# Altium PCB PCB_SensorTapeFlex_v1.PcbDoc (part 4 of 4)
Units mm, origin at the board's own origin, x right, y up, seen from the top; angles counter-clockwise.
Board outline 228.71 x 24.8 mm, 2 copper layers (Top Layer, Bottom Layer); 234 components, 38 nets, 1134 pads, 768 vias.
Unrouted connection lines stored in the file: 1.
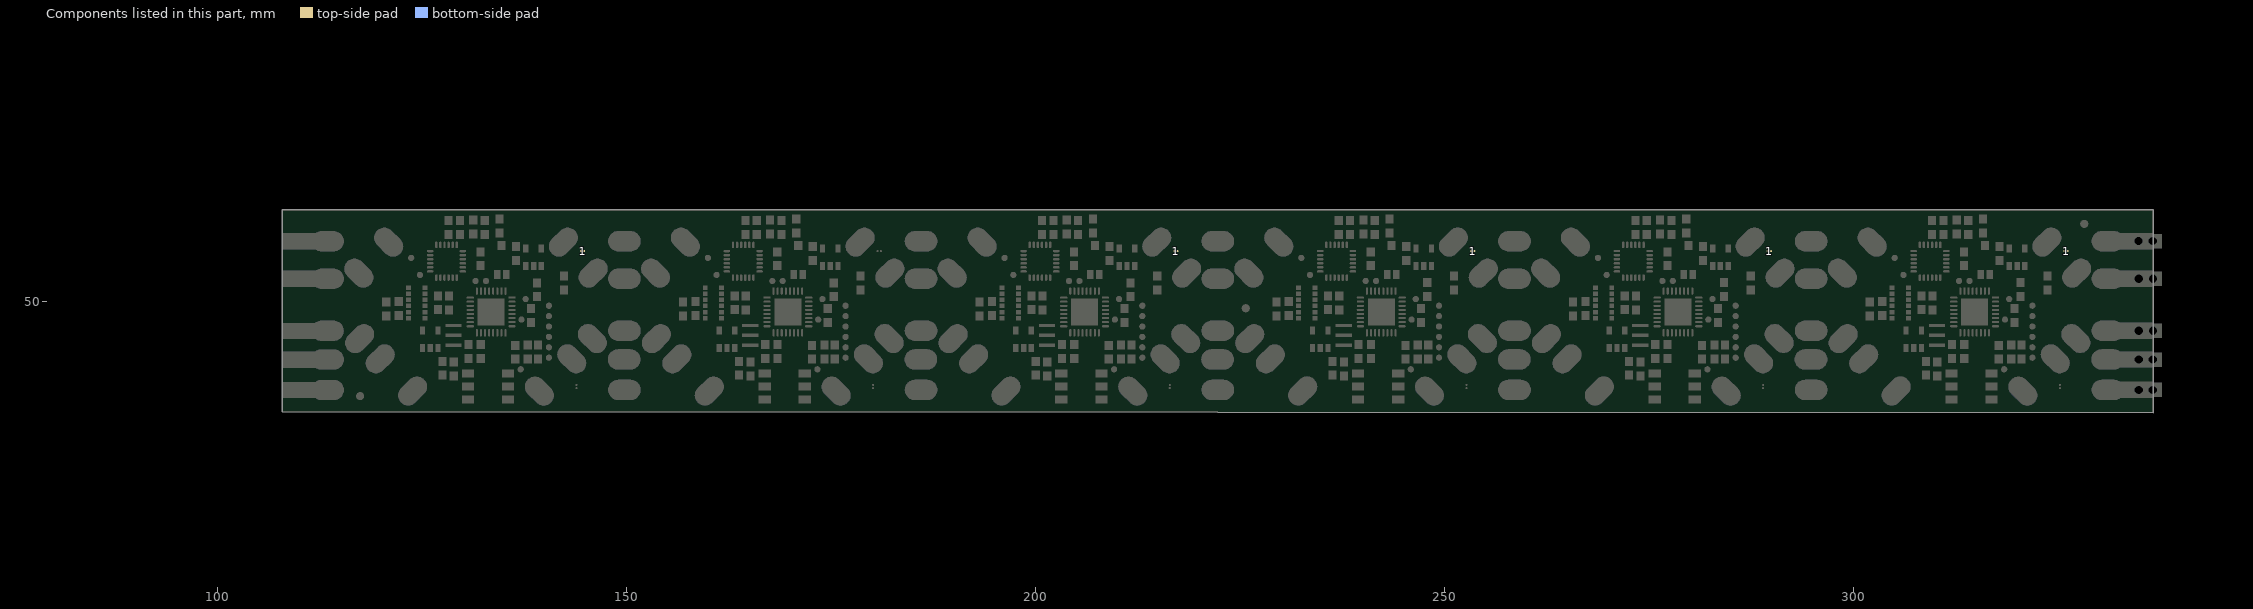
[diagram p4: the components of this part, seen from the top]

## Via types
v1: diameter 0.635, hole 0.381, Top Layer to Bottom Layer, tented both sides, 572 vias
v2: diameter 0.635, hole 0.4, Top Layer to Bottom Layer, tented both sides, 130 vias
v3: diameter 0.66, hole 0.33, Top Layer to Bottom Layer, tented both sides, 54 vias
v4: diameter 0.508, hole 0.508, Top Layer to Bottom Layer, tented both sides, 12 vias

## Nets (pads, with @x,y where several pads share a name; then routed paths per layer and width w, separated by ;. In a path a pad name is that pad's centre, name@x,y a point inside that pad or via, vN(x,y) a via of type N, cw(c..) or ccw(c..) an arc to the next point about the centre after c; other vN are vias at no path point) (continued)
copper on no net: (continued)
  Bottom Layer w0.152: v1(155.78,48.336) 165.141,48.336 165.607,47.87 168.098,47.87 168.329,48.101 168.771,48.101 168.777,48.096 169.524,48.096 169.529,48.101 169.971,48.101 169.977,48.096 170.724,48.096 170.729,48.101 171.171,48.101 171.402,47.87 173.773,47.87 173.933,47.71 177.862,47.71 178.285,48.133 178.869,48.133 v1(179.199,48.463) ; v1(156.644,51.029) 157.584,50.089 v1(166.321,50.089) ; v1(159.082,54.686) 159.387,54.382 160.263,54.382 160.403,54.242 166.143,54.242 166.283,54.382 170.536,54.382 v1(170.891,54.737) ; v1(160.835,54.788) 160.839,54.783 161.975,54.783 162.462,55.271 163.759,55.271 164.246,54.783 165.381,54.783 v1(165.394,54.796) ; v1(162.419,59.944) v1(163.578,59.944) ; 163.47,54.291 v1@163.474,54.691 ; v1(165.178,40.005) 168.214,40.005 169.014,40.805 169.014,40.97 169.52,41.477 169.52,41.759 170.798,43.036 170.817,43.056 170.817,43.068 170.804,43.081 170.804,43.625 171.528,44.349 v1(171.757,44.349) ; v1@165.714,49.539 165.785,49.539 166.161,49.163 166.286,49.163 166.293,49.156 166.293,49.133 ; v1(166.067,51.334) 166.067,51.352 166.1,51.384 166.194,51.384 167.61,49.968 v3(168.55,49.968) ; v1@166.405,48.519 166.385,48.539 v1(166.293,48.539) 166.293,49.133 ; v1(167.261,51.537) 168.125,50.673 171.401,50.673 172.093,49.981 173.155,49.981 173.169,49.996 173.78,49.996 175.516,48.26 v1@175.846,48.26 ; v1@168.988,41.758 169.852,42.621 170.461,43.231 170.461,43.866 169.839,44.488 v1@169.738,44.488 ; 169.09,42.952 169.251,42.945 v1@169.979,43.612 ; 169.316,54.432 169.471,54.587 v1(169.471,54.966) ; 169.471,52.578 169.496,52.578 ; 170.538,41.682 v1@176.05,41.682 ; v1@173.052,51.308 173.111,51.367 173.111,51.387 175.488,49.009 179.425,49.009 179.745,48.69 179.745,48.291 181.911,46.125 ; v1(173.56,49.454) 173.582,49.476 170.439,49.476 169.748,48.785 168.567,48.785 168.218,49.133 166.293,49.133 ; v1(174.017,51.334) v1(179.936,51.334) ; v1(192.053,48.336) 201.414,48.336 201.88,47.87 204.371,47.87 204.603,48.101 205.044,48.101 205.05,48.096 205.797,48.096 205.803,48.101 206.244,48.101 206.25,48.096 206.997,48.096 207.003,48.101 207.444,48.101 207.675,47.87 210.046,47.87 210.206,47.71 214.135,47.71 214.558,48.133 215.142,48.133 v1(215.472,48.463) ; v1(192.917,51.029) 193.857,50.089 v1(202.594,50.089) ; v1(195.355,54.686) 195.66,54.381 196.536,54.381 196.676,54.242 202.417,54.242 202.556,54.381 206.809,54.381 v1(207.164,54.737) ; v1(197.108,54.788) 197.112,54.783 198.248,54.783 198.735,55.27 200.032,55.27 200.519,54.783 201.655,54.783 v1(201.667,54.796) ; v1(198.692,59.944) v1(199.851,59.944) ; 199.743,54.291 v1@199.747,54.691 ; v1(201.451,40.005) 204.487,40.005 205.287,40.805 205.287,40.97 205.794,41.477 205.794,41.759 207.071,43.036 207.09,43.055 207.09,43.068 207.077,43.081 207.077,43.625 207.801,44.348 v1(208.03,44.348) ; v1@201.987,49.539 202.058,49.539 202.434,49.163 202.559,49.163 202.566,49.156 202.566,49.133 ; v1(202.34,51.333) 202.34,51.352 202.373,51.384 202.467,51.384 203.884,49.968 v3(204.823,49.968) ; v1@202.678,48.519 202.658,48.539 v1(202.566,48.539) 202.566,49.133 ; v1(203.534,51.537) 204.398,50.673 207.674,50.673 208.366,49.981 209.428,49.981 209.443,49.996 210.053,49.996 211.789,48.26 v1@212.119,48.26 ; v1@205.261,41.758 206.125,42.621 206.735,43.231 206.735,43.866 206.112,44.488 v1@206.011,44.488 ; 205.363,42.951 205.524,42.944 v1@206.252,43.612 ; 205.59,54.432 205.744,54.587 v1(205.744,54.966) ; 205.744,52.578 205.769,52.578 ; 206.811,41.681 v1@212.323,41.681 ; v1@209.325,51.308 209.384,51.367 209.384,51.387 211.761,49.009 215.698,49.009 216.018,48.69 216.018,48.291 218.184,46.125 ; v1(209.833,49.454) 209.855,49.476 206.712,49.476 206.021,48.785 204.84,48.785 204.491,49.133 202.566,49.133 ; v1(210.291,51.333) v1(216.209,51.333) ; v1(228.325,48.337) 237.686,48.337 238.152,47.871 240.643,47.871 240.874,48.102 241.316,48.102 241.322,48.097 242.068,48.097 242.074,48.102 242.516,48.102 242.522,48.097 243.268,48.097 243.274,48.102 243.716,48.102 243.947,47.871 246.318,47.871 246.478,47.711 250.407,47.711 250.829,48.134 251.414,48.134 v1(251.744,48.464) ; v1(229.189,51.03) 230.128,50.09 v1(238.866,50.09) ; v1(231.627,54.687) 231.932,54.383 232.808,54.383 232.948,54.243 238.688,54.243 238.828,54.383 243.08,54.383 v1(243.436,54.738) ; v1(233.38,54.789) 233.384,54.785 234.52,54.785 235.007,55.272 236.304,55.272 236.791,54.785 237.926,54.785 v1(237.939,54.797) ; v1(234.964,59.945) v1(236.123,59.945) ; 236.015,54.292 v1@236.018,54.692 ; v1(237.723,40.006) 240.758,40.006 241.558,40.806 241.558,40.971 242.065,41.478 242.065,41.76 243.343,43.038 243.362,43.057 243.362,43.069 243.349,43.082 243.349,43.626 244.073,44.35 v1(244.302,44.35) ; v1@238.259,49.54 238.329,49.54 238.706,49.164 238.831,49.164 238.838,49.158 238.838,49.135 ; v1(238.612,51.335) 238.612,51.353 238.644,51.385 238.739,51.385 240.155,49.969 v3(241.095,49.969) ; v1@238.949,48.52 238.93,48.54 v1(238.838,48.54) 238.838,49.135 ; v1(239.806,51.538) 240.669,50.674 243.946,50.674 244.638,49.983 245.699,49.983 245.714,49.997 246.325,49.997 248.061,48.261 v1@248.391,48.261 ; v1@241.533,41.759 242.397,42.622 243.006,43.232 243.006,43.867 242.384,44.489 v1@242.282,44.489 ; 241.635,42.953 241.796,42.946 v1@242.524,43.613 ; 241.861,54.433 242.016,54.588 v1(242.016,54.967) ; 242.016,52.579 242.041,52.579 ; 243.082,41.683 v1@248.594,41.683 ; v1@245.597,51.309 245.656,51.368 245.656,51.388 248.033,49.011 251.97,49.011 252.29,48.691 252.29,48.292 254.456,46.126 ; v1(246.105,49.455) 246.127,49.477 242.984,49.477 242.293,48.786 241.112,48.786 240.763,49.135 238.838,49.135 ; v1(246.562,51.335) v1(252.48,51.335) ; v1(264.598,48.337) 273.959,48.337 274.425,47.871 276.916,47.871 277.147,48.102 277.589,48.102 277.595,48.097 278.342,48.097 278.347,48.102 278.789,48.102 278.795,48.097 279.542,48.097 279.547,48.102 279.989,48.102 280.22,47.871 282.591,47.871 282.751,47.711 286.68,47.711 287.103,48.134 287.687,48.134 v1(288.017,48.464) ; v1(265.462,51.03) 266.402,50.09 v1(275.139,50.09) ; v1(267.9,54.687) 268.205,54.383 269.081,54.383 269.221,54.243 274.961,54.243 275.101,54.383 279.354,54.383 v1(279.709,54.738) ; v1(269.653,54.789) 269.657,54.785 270.793,54.785 271.28,55.272 272.577,55.272 273.064,54.785 274.199,54.785 v1(274.212,54.797) ; v1(271.237,59.945) v1(272.396,59.945) ; 272.288,54.292 v1@272.292,54.692 ; v1(273.996,40.006) 277.031,40.006 277.832,40.806 277.832,40.971 278.338,41.478 278.338,41.76 279.616,43.038 279.635,43.057 279.635,43.069 279.622,43.082 279.622,43.626 280.346,44.35 v1(280.575,44.35) ; v1@274.532,49.54 274.603,49.54 274.979,49.164 275.104,49.164 275.111,49.157 275.111,49.135 ; v1(274.885,51.335) 274.885,51.353 274.918,51.385 275.012,51.385 276.428,49.969 v3(277.368,49.969) ; v1@275.223,48.52 275.203,48.54 v1(275.111,48.54) 275.111,49.135 ; v1(276.079,51.538) 276.943,50.674 280.219,50.674 280.911,49.983 281.973,49.983 281.987,49.997 282.598,49.997 284.334,48.261 v1@284.664,48.261 ; v1@277.806,41.759 278.67,42.622 279.279,43.232 279.279,43.867 278.657,44.489 v1@278.555,44.489 ; 277.908,42.953 278.069,42.946 v1@278.797,43.613 ; 278.134,54.433 278.289,54.588 v1(278.289,54.967) ; 278.289,52.579 278.314,52.579 ; 279.356,41.683 v1@284.867,41.683 ; v1@281.87,51.309 281.929,51.368 281.929,51.388 284.306,49.011 288.243,49.011 288.563,48.691 288.563,48.292 290.729,46.126 ; v1(282.378,49.455) 282.4,49.477 279.257,49.477 278.566,48.786 277.385,48.786 277.036,49.135 275.111,49.135 ; v1(282.835,51.335) v1(288.754,51.335) ; v1(300.871,48.338) 310.232,48.338 310.699,47.872 313.19,47.872 313.421,48.103 313.862,48.103 313.868,48.097 314.615,48.097 314.621,48.103 315.062,48.103 315.068,48.097 315.815,48.097 315.821,48.103 316.262,48.103 316.493,47.872 318.864,47.872 319.024,47.712 322.953,47.712 323.376,48.135 323.96,48.135 v1(324.29,48.465) ; v1(301.735,51.03) 302.675,50.09 v1(311.412,50.09) ; v1(304.173,54.688) 304.478,54.383 305.355,54.383 305.494,54.243 311.235,54.243 311.374,54.383 315.627,54.383 v1(315.983,54.739) ; v1(305.926,54.789) 305.931,54.785 307.066,54.785 307.553,55.272 308.85,55.272 309.337,54.785 310.473,54.785 v1(310.485,54.798) ; v1(307.51,59.946) v1(308.669,59.946) ; 308.561,54.292 v1@308.565,54.692 ; v1(310.269,40.007) 313.305,40.007 314.105,40.807 314.105,40.972 314.612,41.479 314.612,41.76 315.889,43.038 315.908,43.057 315.908,43.07 315.896,43.082 315.896,43.626 316.619,44.35 v1(316.848,44.35) ; v1@310.805,49.541 310.876,49.541 311.252,49.165 311.377,49.165 311.384,49.158 311.384,49.135 ; v1(311.158,51.335) 311.158,51.353 311.191,51.386 311.285,51.386 312.702,49.97 v3(313.641,49.97) ; v1@311.496,48.52 311.476,48.54 v1(311.384,48.54) 311.384,49.135 ; v1(312.352,51.538) 313.216,50.675 316.492,50.675 317.184,49.983 318.246,49.983 318.261,49.998 318.871,49.998 320.607,48.262 v1@320.937,48.262 ; v1@314.079,41.759 314.943,42.623 315.553,43.232 315.553,43.867 314.93,44.49 v1@314.829,44.49 ; 314.181,42.953 314.342,42.946 v1@315.07,43.613 ; 314.408,54.434 314.562,54.588 v1(314.562,54.967) ; 314.563,52.58 314.587,52.58 ; 315.629,41.683 v1@321.141,41.683 ; v1@318.143,51.31 318.202,51.368 318.202,51.388 320.579,49.011 324.516,49.011 324.836,48.691 324.836,48.293 327.003,46.127 ; v1(318.651,49.455) 318.674,49.477 315.53,49.477 314.839,48.786 313.658,48.786 313.31,49.135 311.384,49.135 ; v1(319.109,51.335) v1(325.027,51.335)
  Bottom Layer w0.254: v1@163.48,54.576 v1(163.48,54.695) ; v1(176.989,54.61) 177.09,54.711 177.09,55.244 177.472,55.626 ; v1@199.753,54.576 v1(199.753,54.695) ; v1(213.262,54.61) 213.363,54.711 213.363,55.244 213.745,55.626 ; v1@236.025,54.577 v1(236.025,54.696) ; v1(249.534,54.611) 249.635,54.712 249.635,55.246 250.017,55.627 ; v1@272.298,54.577 v1(272.298,54.696) ; v1(285.807,54.611) 285.908,54.712 285.908,55.246 286.29,55.627 ; v1@308.572,54.577 v1(308.572,54.697) ; v1(322.08,54.612) 322.181,54.713 322.181,55.246 322.563,55.628
  other v1: 159.614,37.707 176.176,37.719 195.887,37.707 212.45,37.719 232.159,37.708 248.721,37.72 268.432,37.708 284.994,37.72 304.705,37.709 321.268,37.721 158.725,38.495 177.065,38.507 194.998,38.495 213.339,38.506 231.27,38.496 249.61,38.508 267.543,38.496 285.883,38.508 303.816,38.496 322.157,38.508 187.352,38.659 223.626,38.659 259.897,38.66 296.17,38.66 332.444,38.66 184.812,38.761 221.086,38.76 257.357,38.762 293.63,38.762 329.904,38.762 161.57,39.739 174.221,39.751 197.843,39.739 210.494,39.751 234.115,39.74 246.765,39.752 270.388,39.74 283.039,39.752 306.661,39.741 319.312,39.753 184.812,39.777 221.086,39.776 257.357,39.778 293.63,39.778 329.904,39.778 187.251,39.878 223.524,39.878 259.796,39.879 296.069,39.879 332.342,39.88 160.732,40.4 175.059,40.412 197.005,40.4 211.332,40.411 233.277,40.401 247.604,40.413 269.55,40.401 283.877,40.413 305.823,40.401 320.15,40.413 170.258,41.529 206.531,41.529 242.803,41.53 279.076,41.53 315.349,41.531 155.677,41.644 176.1,41.656 180.113,41.656 191.95,41.644 212.373,41.656 216.387,41.656 228.222,41.645 248.645,41.657 252.658,41.657 264.495,41.645 284.918,41.657 288.931,41.657 300.768,41.646 321.191,41.658 325.205,41.658 168.963,41.758 205.236,41.758 241.508,41.759 277.781,41.759 314.054,41.759 184.609,42.215 220.882,42.215 257.154,42.216 293.427,42.216 329.7,42.216 187.352,42.367 223.626,42.367 259.897,42.368 296.17,42.368 332.444,42.369 154.788,42.406 181.002,42.418 191.061,42.406 217.276,42.418 227.333,42.407 253.547,42.419 263.606,42.407 289.82,42.419 299.879,42.408 326.094,42.42 171.35,43.307 207.624,43.307 243.895,43.308 280.168,43.308 316.442,43.309 184.533,43.383 220.806,43.383 257.078,43.384 293.351,43.384 329.624,43.385 169.852,43.485 206.125,43.485 242.397,43.486 278.67,43.486 314.943,43.486 187.276,43.612 223.549,43.612 259.821,43.613 296.094,43.613 332.367,43.613 157.633,43.676 178.158,43.688 193.906,43.676 214.431,43.688 230.178,43.677 250.702,43.689 266.451,43.677 286.976,43.689 302.724,43.678 323.249,43.69 153.112,44.159 182.679,44.171 189.385,44.159 218.952,44.171 225.657,44.16 255.224,44.172 261.93,44.16 291.497,44.172 298.203,44.16 327.77,44.172 156.871,44.337 178.92,44.349 193.144,44.337 215.193,44.348 229.416,44.338 251.464,44.35 265.689,44.338 287.738,44.35 301.962,44.338 324.011,44.35 169.776,44.526 206.049,44.526 242.32,44.527 278.594,44.527 314.867,44.528 152.293,44.744 183.497,44.756 188.567,44.744 219.77,44.756 224.838,44.746 256.042,44.757 261.111,44.746 292.315,44.757 297.385,44.746 328.588,44.758 184.558,45.746 220.832,45.745 257.103,45.747 293.376,45.747 329.65,45.747 187.327,45.796 223.6,45.796 259.872,45.797 296.145,45.797 332.418,45.798 155.093,46.013 180.698,46.025 191.366,46.013 216.971,46.025 227.638,46.014 253.242,46.026 263.911,46.014 289.516,46.026 300.184,46.015 325.789,46.026 184.558,46.635 220.832,46.634 257.103,46.636 293.376,46.636 329.65,46.636 154.331,46.775 181.46,46.787 190.604,46.775 217.733,46.787 226.876,46.776 254.004,46.788 263.149,46.776 290.278,46.788 299.422,46.777 326.551,46.788 187.302,47.092 223.575,47.092 259.846,47.093 296.12,47.093 332.393,47.093 165.684,47.839 201.957,47.839 238.229,47.84 274.502,47.84 310.775,47.84 175.973,48.26 212.246,48.26 248.518,48.261 284.791,48.261 321.064,48.262 165.762,49.556 202.036,49.555 238.307,49.557 274.58,49.557 310.854,49.557 172.9,51.461 209.173,51.46 245.445,51.462 281.718,51.462 317.991,51.462 154.026,52.135 181.764,52.146 190.299,52.135 218.038,52.146 226.571,52.136 254.309,52.147 262.844,52.136 290.582,52.147 299.117,52.136 326.856,52.148 187.429,52.248 223.702,52.248 259.973,52.249 296.247,52.249 332.52,52.249 170.41,52.327 206.683,52.327 242.955,52.328 279.228,52.328 315.501,52.328 184.685,52.35 220.959,52.349 257.23,52.351 293.503,52.351 329.777,52.351 154.991,53.049 180.799,53.061 191.265,53.049 217.072,53.061 227.536,53.05 253.344,53.062 263.809,53.05 289.617,53.062 300.083,53.05 325.89,53.062 184.685,53.366 220.959,53.365 257.23,53.367 293.503,53.367 329.777,53.367 187.403,53.442 223.676,53.442 259.948,53.443 296.221,53.443 332.494,53.443 152.197,54.09 183.593,54.102 188.471,54.09 219.866,54.102 224.742,54.091 256.138,54.103 261.015,54.091 292.411,54.103 297.289,54.092 328.684,54.104 153.264,54.852 182.526,54.864 189.537,54.852 218.8,54.864 225.809,54.853 255.071,54.865 262.082,54.853 291.344,54.865 298.355,54.854 327.618,54.866 157.616,55.932 193.889,55.932 230.161,55.933 266.434,55.933 302.708,55.934 178.174,55.98 214.447,55.98 250.719,55.981 286.992,55.981 323.266,55.982 187.352,56.769 223.626,56.769 259.897,56.77 296.17,56.77 332.444,56.771 158.632,56.821 184.685,56.82 194.905,56.821 220.959,56.82 231.177,56.822 257.23,56.821 267.45,56.822 293.503,56.821 303.724,56.823 329.777,56.821 177.158,56.869 213.431,56.869 249.703,56.87 285.976,56.87 322.25,56.871 155.762,57.913 192.035,57.913 228.307,57.914 264.58,57.914 300.853,57.915 180.029,57.961 216.302,57.961 252.573,57.962 288.846,57.962 325.12,57.963 184.66,58.039 220.933,58.039 257.205,58.04 293.478,58.04 329.751,58.041 187.352,58.065 223.626,58.064 259.897,58.066 296.17,58.066 332.444,58.066 156.651,58.65 192.924,58.65 229.196,58.651 265.469,58.651 301.742,58.651 179.14,58.698 215.413,58.698 251.684,58.699 287.957,58.699 324.231,58.699
  other v2: 159.856,38.689 196.13,38.689 232.401,38.69 268.674,38.69 304.948,38.691 175.959,38.718 212.232,38.718 248.504,38.719 284.777,38.719 321.05,38.72 175.209,39.43 211.482,39.43 247.754,39.431 284.027,39.431 320.3,39.431 160.568,39.439 196.841,39.439 233.113,39.44 269.386,39.44 305.659,39.44 155.883,42.65 179.939,42.646 192.156,42.65 216.213,42.646 228.428,42.651 252.484,42.647 264.701,42.651 288.757,42.647 300.974,42.652 325.031,42.647 179.19,43.357 215.463,43.357 251.734,43.358 288.008,43.358 324.281,43.359 156.594,43.4 192.867,43.4 229.139,43.401 265.412,43.401 301.685,43.401 182.421,45.14 218.694,45.14 254.966,45.142 291.239,45.142 327.512,45.142 153.354,45.171 189.627,45.17 225.899,45.172 262.172,45.172 298.445,45.172 181.671,45.852 217.944,45.852 254.216,45.853 290.489,45.853 326.762,45.853 154.065,45.92 190.338,45.92 226.61,45.921 262.883,45.921 299.156,45.922 153.932,53.096 190.205,53.096 226.477,53.097 262.75,53.097 299.023,53.098 181.918,53.101 218.191,53.101 254.463,53.102 290.736,53.102 327.009,53.103 153.182,53.807 189.455,53.807 225.727,53.809 262,53.809 298.273,53.809 182.629,53.851 218.903,53.851 255.174,53.852 291.447,53.852 327.721,53.852 157.673,56.757 193.946,56.757 230.218,56.758 266.491,56.758 302.764,56.758 178.183,56.901 214.456,56.901 250.728,56.902 287.001,56.902 323.274,56.903 156.923,57.468 193.196,57.468 229.468,57.469 265.741,57.469 302.014,57.47 178.894,57.651 215.167,57.651 251.439,57.652 287.712,57.652 323.985,57.652
  other v3: 168.55,47.568 169.75,47.568 170.95,47.568 204.823,47.568 206.023,47.568 207.223,47.568 241.095,47.569 242.295,47.569 243.495,47.569 277.368,47.569 278.568,47.569 279.768,47.569 313.641,47.57 314.841,47.57 316.041,47.57 168.55,48.768 169.75,48.768 170.95,48.768 204.823,48.768 206.023,48.768 207.223,48.768 241.095,48.769 242.295,48.769 243.495,48.769 277.368,48.769 278.568,48.769 279.768,48.769 313.641,48.77 314.841,48.77 316.041,48.77 169.75,49.968 170.95,49.968 206.023,49.968 207.223,49.968 242.295,49.969 243.495,49.969 278.568,49.969 279.768,49.969 314.841,49.97 316.041,49.97
  other v4: 140.553,41.899 176.826,41.899 213.099,41.899 249.371,41.901 285.644,41.901 321.917,41.901 140.553,50.775 176.826,50.775 213.099,50.775 249.371,50.776 285.644,50.776 321.917,50.777

## Other copper
Bottom Layer:
  rectangle: 316.137,42.41 331.102,43.41
  rectangle: 294.872,52.014 331.128,54.014
  rectangle: 294.773,45.045 331.128,47.045
  rectangle: 294.854,37.023 331.128,41.023
  rectangle: 294.791,55.475 331.102,59.475
  rectangle: 294.877,42.385 314.342,43.385
  rectangle: 222.331,42.384 241.796,43.384
  rectangle: 222.244,55.475 258.555,59.475
  rectangle: 222.308,37.022 258.581,41.022
  rectangle: 222.226,45.044 258.581,47.044
  rectangle: 222.325,52.013 258.581,54.013
  rectangle: 243.59,42.409 258.556,43.409
  rectangle: 279.864,42.409 294.829,43.409
  rectangle: 258.598,52.013 294.854,54.013
  rectangle: 258.5,45.044 294.854,47.044
  rectangle: 258.581,37.022 294.854,41.022
  rectangle: 258.518,55.475 294.828,59.475
  rectangle: 258.604,42.384 278.069,43.384
  rectangle: 186.059,42.383 205.524,43.383
  rectangle: 185.973,55.474 222.284,59.474
  rectangle: 186.036,37.021 222.309,41.021
  rectangle: 185.955,45.043 222.309,47.043
  rectangle: 186.054,52.012 222.309,54.012
  rectangle: 207.319,42.408 222.284,43.408
  rectangle: 171.046,42.408 186.011,43.408
  rectangle: 149.78,52.012 186.036,54.012
  rectangle: 149.682,45.043 186.036,47.043
  rectangle: 149.763,37.021 186.036,41.021
  rectangle: 149.7,55.474 186.01,59.474
  rectangle: 149.786,42.383 169.251,43.383
  rectangle net P2P_RX: 113.513,42.383 132.978,43.383
  rectangle net VIN: 113.426,55.474 149.737,59.474
  rectangle net GND: 113.49,37.021 149.763,41.021
  rectangle net SDA: 113.408,45.043 149.763,47.043
  rectangle net SCL: 113.507,52.012 149.763,54.012
  rectangle net P2P_TX: 134.772,42.408 149.738,43.408

## Silkscreen, mask and mechanical layers (free items; w line width, h text height)
Top Overlay:
  drawing of 200 lines, arcs and shapes, not listed
  text "gnd" at 141.491,49.359 h0.76
  text "gnd" at 177.765,49.359 h0.76
  text "gnd" at 214.038,49.359 h0.76
  text "gnd" at 250.309,49.36 h0.76
  text "gnd" at 286.582,49.36 h0.76
  text "gnd" at 322.856,49.36 h0.76
  text "reset" at 141.565,47.946 h0.76
  text "reset" at 177.838,47.946 h0.76
  text "reset" at 214.111,47.946 h0.76
  text "reset" at 250.383,47.948 h0.76
  text "reset" at 286.656,47.948 h0.76
  text "reset" at 322.929,47.948 h0.76
  text "sck" at 141.62,46.681 h0.76
  text "sck" at 177.893,46.681 h0.76
  text "sck" at 214.166,46.681 h0.76
  text "sck" at 250.438,46.682 h0.76
  text "sck" at 286.711,46.682 h0.76
  text "sck" at 322.984,46.682 h0.76
  text "mosi" at 141.275,45.568 h0.76
  text "mosi" at 177.548,45.568 h0.76
  text "mosi" at 213.821,45.568 h0.76
  text "mosi" at 250.093,45.569 h0.76
  text "mosi" at 286.366,45.569 h0.76
  text "mosi" at 322.639,45.569 h0.76
Top Solder:
  rectangle: 107.859,36.527 110.993,61.357
  rectangle: 332.881,36.425 336.656,61.279
Bottom Solder:
  rectangle: 107.857,36.55 111.207,61.359
  rectangle: 332.75,36.402 336.703,61.349
Mechanical 1:
  lines w0.127: 107.951,61.251 107.934,36.546 336.645,36.453 336.645,61.258 107.957,61.258
Mechanical 13:
  text "R4" at 134.443,61.437 h0.76
  text "TX" at 202.29,51.918 h0.76
  text "TX" at 311.108,51.919 h0.76

## Text inside footprints (layer, text, board x,y; h text height)
L1: Top Overlay "1" at 317.96,37.161 h0.76
L1: Top Overlay "1" at 245.414,37.16 h0.76
L1: Top Overlay "1" at 281.687,37.16 h0.76
L1: Top Overlay "1" at 209.142,37.159 h0.76
L1: Top Overlay "1" at 172.869,37.159 h0.76
L1: Top Overlay "1" at 136.596,37.159 h0.76
U1: Top Overlay "1" at 307.342,52.554 h0.76 r90
U1: Top Overlay "1" at 234.795,52.554 h0.76 r90
U1: Top Overlay "1" at 271.069,52.554 h0.76 r90
U1: Top Overlay "1" at 198.524,52.553 h0.76 r90
U1: Top Overlay "1" at 162.251,52.553 h0.76 r90
U1: Top Overlay "1" at 125.977,52.553 h0.76 r90
U3: Top Overlay "o" at 303.937,52.438 h0.76
U3: Top Overlay "o" at 231.391,52.438 h0.76
U3: Top Overlay "o" at 267.664,52.438 h0.76
U3: Top Overlay "o" at 195.119,52.437 h0.76
U3: Top Overlay "o" at 158.846,52.437 h0.76
U3: Top Overlay "o" at 122.573,52.437 h0.76